# Altium PCB KNoT-Gateway Mini Starter Board.PcbDoc
Units mil, origin at the board's own origin, x right, y up, seen from the top; angles counter-clockwise.
Board outline 1800 x 800 mil, 2 copper layers (Top Layer, Bottom Layer); 14 components, 16 nets, 52 pads, 8 vias.
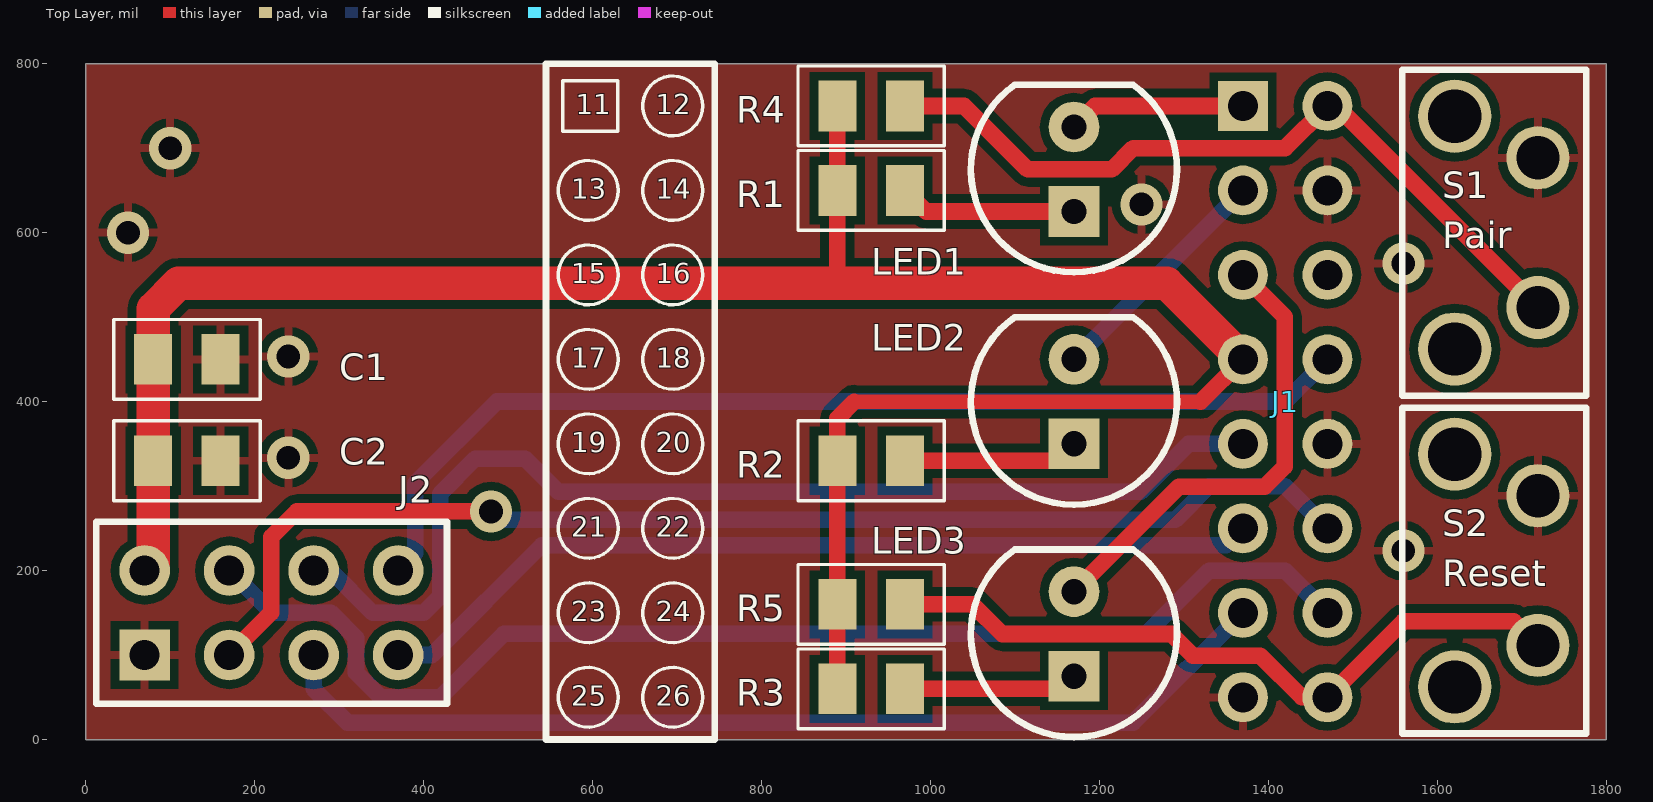
[diagram p0: Top Layer view]
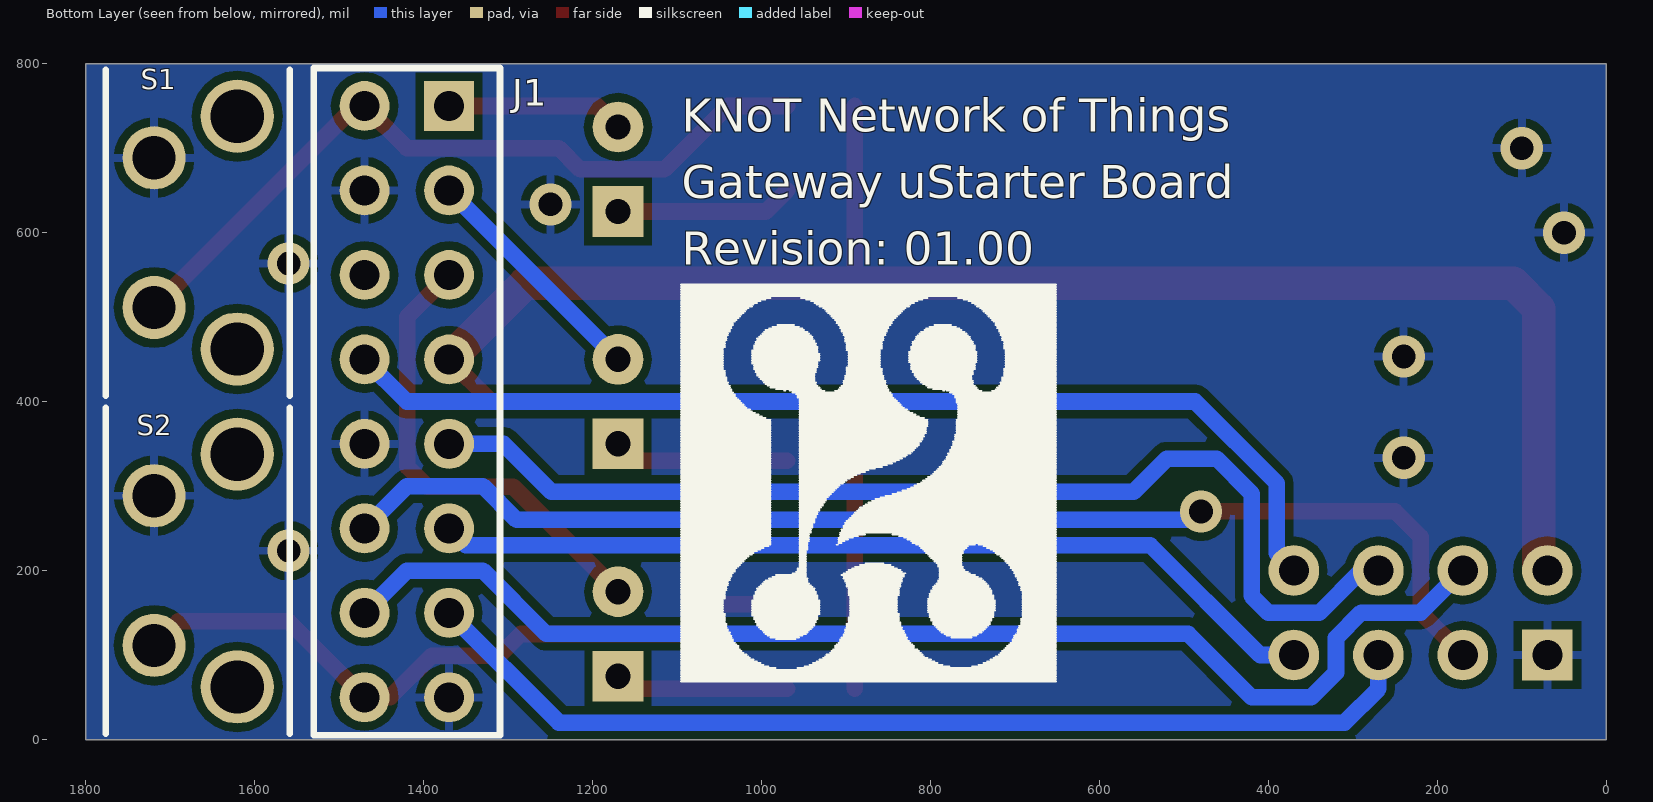
[diagram p1: Bottom Layer view, seen from below]

## Layer stack, top to bottom
Top Solder: solder mask 0.4, Solder Resist, Dk 3.5
Top Layer: signal copper 1.4
Dielectric 1: dielectric 12.6, FR-4, Dk 4.8
Bottom Layer: signal copper 1.4
Bottom Solder: solder mask 0.4, Solder Resist, Dk 3.5

## Board outline
0,0 0,800 1800,800 1800,0

## Design rules (kind name [scope] priority, off if disabled: settings)
Clearance [All] p1: gap=10
Clearance Clearance_1 [All vs (InNamedPolygon('Top Layer-GND'))] p2: gap=15.75
PolygonConnect [All] p1: connectstyle=Relief reliefconductorwidth=10 reliefentries=4 polygonreliefangle="90 Angle" airgapwidth=10
RoutingVias [All] p1: holewidth=28 width=50 viastyle="Through Hole" minholewidth=28 minwidth=50 maxholewidth=28 maxwidth=50
SMDNeckDown [All] p1: percent=90.000
SilkToSilkClearance [All] p1: silktosilkclearance=3.94
SolderMaskExpansion [All] p1: expansion=4
Width Width_Power [InNetClass('Power')] p1: maxlimit=39.37 minlimit=15.75 preferedwidth=19.68 minimp=50.000000 maximp=50.000000 favimp=50.000000
Width [All] p2: maxlimit=19.68 minlimit=10 preferedwidth=10 minimp=50.000000 maximp=50.000000 favimp=50.000000
28 further rules are at their usual default settings.

## Classes and differential pairs
net class Power: 3V3 GND

## Components (designator, comment, footprint, x,y, rotation, side; value= is the part's Value field where it differs from the comment)
C1 "Cap 0805 0.1uF" 0805_CAPS 119.83,450 r0 top
C2 "Cap 0805 10uF" 0805_CAPS 119.83,330 r0 top
J1 "Female 2x8 header" "FEMALE HEADER 2X8" 1419.83,400 r270 top
J2 "2x4 Female Header" nRF24L01+PA+LNA 219.83,150 r180 top
LED1 "LED RADIAL 5MM RED" "LED RADIAL 5MM RED" 1169.83,625 r90 top
LED2 "LED RADIAL 5MM GREEN" "LED RADIAL 5MM GREEN" 1169.83,350 r90 top
LED3 "LED RADIAL 5MM GREEN" "LED RADIAL 5MM GREEN" 1169.83,75 r90 top
R1 "RES_0805" 0805_RES 929.83,650 r180 top
R2 "RES_0805" 0805_RES 929.83,330 r180 top
R3 "RES_0805" 0805_RES 929.83,60 r180 top
R4 "RES_0805" 0805_RES 929.83,750 r180 top
R5 "RES_0805" 0805_RES 929.83,160 r180 top
S1 "Push Button" "Tac Push Button L" 1669.83,600 r270 bottom
S2 "Push Button" "Tac Push Button S" 1669.83,200 r270 bottom

## Footprints (in the part's own frame and the unit in brackets; to place one, negate y for a bottom-side part, rotate by r counter-clockwise, add the part's x,y. Pads: shape width x height; smd on the part's side, far side on the other; paste and mask are expansions set on the pad)
0805_CAPS [mil] "08'' x 05'' Passive Surface Mounted Device"
  rect 45x60 smd: 1(-40,0) 2(40,0)
  silkscreen extent -87,-47 87,47, body extent -39,-25 39,25, height 39
0805_RES [mil] "08'' x 05'' Passive Surface Mounted Device"
  rect 45x60 smd: 1(-40,0) 2(40,0)
  silkscreen extent -87,-47 87,47, body extent -45,-27 45,27, height 30
"FEMALE HEADER 2X8" [mm] "Female Header Bottom Connector 2x8"
  rect 1.5x1.5 hole 0.9: 1(-8.89,-1.27)
  round 1.5 hole 0.9: 2(-8.89,1.27) 3(-6.35,-1.27) 4(-6.35,1.27) 5(-3.81,-1.27) 6(-3.81,1.27) 7(-1.27,-1.27) 8(-1.27,1.27) 9(1.27,-1.27) 10(1.27,1.27) 11(3.81,-1.27) 12(3.81,1.27) 13(6.35,-1.27) 14(6.35,1.27) 15(8.89,-1.27) 16(8.89,1.27)
  body extent -10.16,-2.54 10.16,2.54, height 3.05
"LED RADIAL 5MM GREEN" [mil] "LED RADIAL 5MM THROUGH HOLE 100 MILS PITCH"
  rect 60x60 hole 30: 1(0,0)
  round 60 hole 30: 2(100,0)
  silkscreen extent -72,-122 150,122, body extent -68,-118 148,118, height 352
"LED RADIAL 5MM RED" [mil] "LED RADIAL 5MM THROUGH HOLE 100 MILS PITCH"
  rect 60x60 hole 30: 1(0,0)
  round 60 hole 30: 2(100,0)
  silkscreen extent -72,-122 150,122, body extent -68,-118 148,118, height 352
nRF24L01+PA+LNA [mil] "nRF24L01+PA+LNA MODULE"
  rect 60x60 hole 35.43: 1(150,50)
  round 60 hole 35.43: 2(150,-50) 3(50,50) 4(50,-50) 5(-50,50) 6(-50,-50) 7(-150,50) 8(-150,-50)
  silkscreen extent -208,-108 207,108, body extent -301,-2439 292,125
"Tac Push Button L" [mm] "Panasonic Small Tac Push Button 8.35mm"
  round 2.2 hole 1.6: 0(-3.5,1.25) 0(3.5,1.25)
  round 1.9 hole 1.3: 1(-2.25,-1.25) 2(2.25,-1.25)
  silkscreen extent -4.9,-2.7 4.9,2.83, body extent -4.06,-9.38 4.04,2.27, height 7.31
"Tac Push Button S" [mm] "Panasonic Small Tac Push Button 5.85mm"
  round 2.2 hole 1.6: 0(-3.5,1.25) 0(3.5,1.25)
  round 1.9 hole 1.3: 1(-2.25,-1.25) 2(2.25,-1.25)
  silkscreen extent -4.9,-2.7 4.9,2.83, body extent -3.94,-6.99 4.16,2.16, height 7.31

## Part data
C1: library part Cap_0805_0.1uF, "0.1µF  Ceramic Capacitor 0805"
C2: library part Cap_0805_10uF, "10uF Ceramic Capacitor 0805"
J1: library part "2x8 RPi Header", "Female Bottom 2x4 Header"
J2: library part nRF24L01+, "nRF24L01 2x4 HEADER"
LED1 LED2 LED3: "LED RADIAL"
R1 R2 R3 R4 R5: "Precision Thick Film Chip Resistor, 10 Ohm to 1M Ohm Range, 1% and 0.5% Tolerance, 0805 Size, 1/8 W"
S1: library part "Push Button L", "Tactile Push Button Right Angle"
S2: library part "Push Button S", "Tactile Push Button Right Angle"

## Via types
v1: diameter 50, hole 28, Top Layer to Bottom Layer, 8 vias

## Nets (pads, with @x,y where several pads share a name; then routed paths per layer and width w, separated by ;. In a path a pad name is that pad's centre, name@x,y a point inside that pad or via, vN(x,y) a via of type N, cw(c..) or ccw(c..) an arc to the next point about the centre after c; other vN are vias at no path point)
3V3: C1.1 C2.1 J1.7 J2.2 R1.2 R2.2 R3.2 R4.2 R5.2 | length 2692.8
  Top Layer w17.72: 909.65,399.82 1319.65,399.82
  Top Layer w19.68: R3.2 R5.2 889.83,380 909.65,399.82 ; 889.83,540 R1.2 R4.2 ; 1319.65,399.82 J1.7
  Top Layer w39.37: J2.2 79.83,210 C2.1 C1.1 79.83,510 109.83,540 889.83,540 1279.83,540 J1.7
GND: C1.2 C2.2 J1.4 J1.10 J1.15 J2.1 S1.1 S2.1
  other v1: 1559.83,223.48 239.83,333.48 239.83,453.48 1559.83,563.48 50,600 1249.83,633.48 100,700
LED1: J1.1 LED1.2 | length 210.4
  Top Layer w19.68: LED1.2 1194.83,750 J1.1
LED2: J1.3 LED2.2 | length 282.8
  Bottom Layer w19.68: LED2.2 J1.3
LED3: J1.5 LED3.2 | length 558.2
  Top Layer w19.68: LED3.2 1294.2,299.37 1395.71,299.37 1419.2,322.85 1419.2,500.63 J1.5
NetLED1_1: LED1.1 R1.1 | length 210.4
  Top Layer w19.68: R1.1 994.83,625 LED1.1
NetLED2_1: LED2.1 R2.1 | length 208.3
  Top Layer w19.68: R2.1 1149.83,330 LED2.1
NetLED3_1: LED3.1 R3.1 | length 206.2
  Top Layer w19.68: R3.1 1154.83,60 LED3.1
NRF_CE: J1.12 J2.3 | length 1464.6
  Top Layer w19.68: J2.3 169.83,100.32 219.67,150.16 219.67,239.84 249.83,270 v1(479.83,270)
  Bottom Layer w19.68: v1(479.83,270) 489.83,260 1289.83,260 1329.83,300 1419.83,300 J1.12
NRF_CLK: J1.13 J2.5 | length 1210.4
  Bottom Layer w19.68: J2.5 269.83,60 309.83,20 1239.83,20 J1.13
NRF_CSN: J1.14 J2.4 | length 1469
  Bottom Layer w19.68: J2.4 170.14,200 219.98,150.16 290.16,150.16 319.98,120.33 319.98,79.36 349.18,50.16 369.67,50.16 369.83,50 419.83,50 494.98,125.16 1254.98,125.16 1329.83,200 1419.83,200 J1.14
NRF_IRQ: J1.8 J2.8 | length 1252.2
  Bottom Layer w19.68: J2.8 390.14,220.32 390.14,303.44 486.86,400.16 1419.98,400.16 J1.8
NRF_MISO: J1.11 J2.7 | length 1062.1
  Bottom Layer w19.68: J2.7 409.83,100 539.83,230 1349.83,230 J1.11
NRF_MOSI: J1.9 J2.6 | length 1307.1
  Bottom Layer w19.68: J2.6 289.83,200 339.83,150 399.83,150 419.83,170 419.83,291.14 461.16,332.48 520.22,332.48 559.59,293.11 1248.57,293.11 1305.46,350 J1.9
SW_PAIR: J1.2 R4.1 S1.2 | length 910.3
  Top Layer w19.68: R4.1 1039.83,750 1114.98,674.84 1214.67,674.84 1239.83,700 1419.83,700 J1.2 1480.46,750 S1.2
SW_RESET: J1.16 R5.1 S2.2 | length 843.9
  Top Layer w19.68: R5.1 1049.83,160 1084.98,124.84 1284.98,124.84 1310.46,99.37 1390.28,99.37 1439.65,50 J1.16 1559.83,140 1690.46,140 S2.2
pads on no net: J1.6 S1.0 S2.0

## Polygon pours and split planes (outlines as drawn)
GND on Top Layer "Top Layer-GND" (solid, pour order 4): 0,800 0,0 1800,0 1800,800
GND on Bottom Layer "Bot Layer-GND" (solid, pour order 3): 0,800 0,0 1800,0 1800,800

## Silkscreen, mask and mechanical layers (free items; w line width, h text height)
Top Overlay:
  circle w3.94: c694.83,750 r35.43
  circle w3.94: c694.83,650 r35.43
  circle w3.94: c594.83,650 r35.43
  circle w3.94: c594.83,550 r35.43
  circle w3.94: c594.83,450 r35.43
  circle w3.94: c594.83,350 r35.43
  circle w3.94: c594.83,250 r35.43
  circle w3.94: c594.83,50 r35.43
  circle w3.94: c594.83,150 r35.43
  circle w3.94: c694.83,50 r35.43
  circle w3.94: c694.83,150 r35.43
  circle w3.94: c694.83,250 r35.43
  circle w3.94: c694.83,350 r35.43
  circle w3.94: c694.83,450 r35.43
  circle w3.94: c694.83,550 r35.43
  lines w3.94: 564.83,720 564.83,725 564.83,775 564.83,780 629.83,780 629.83,775 629.83,725 629.83,720 569.83,720 564.83,720
  lines w7.87: 544.83,0 744.83,0 744.83,800 544.83,800 544.83,0 ; 1558.53,7.09 1558.53,392.91 1776.13,392.91 1776.13,7.09 1558.53,7.09 ; 1558.53,407.09 1558.53,792.91 1776.13,792.91 1776.13,407.09 1558.53,407.09
  text "11" at 580,740 h23.62
  text "12" at 675,740 h23.62
  text "S1" at 1606.05,640.55 h31.5
  text "13" at 575,640 h23.62
  text "14" at 675,640 h23.62
  text "Pair" at 1606.05,581.5 h31.5
  text "15" at 575,540 h23.62
  text "16" at 675,540 h23.62
  text "17" at 575,440 h23.62
  text "18" at 675,440 h23.62
  text "19" at 575,340 h23.62
  text "20" at 675,340 h23.62
  text "S2" at 1606.05,240.55 h31.5
  text "21" at 575,240 h23.62
  text "22" at 675,240 h23.62
  text "Reset" at 1606.05,181.5 h31.5
  text "23" at 575,140 h23.62
  text "24" at 675,140 h23.62
  text "25" at 575,40 h23.62
  text "26" at 675,40 h23.62
Bottom Overlay:
  drawing of 866 lines, arcs and shapes, not listed
  text "KNoT Network of Things" at 1094.24,719.29 h39.37
  text "Gateway uStarter Board" at 1094.24,640.55 h39.37
  text "Revision: 01.00" at 1094.24,561.81 h39.37
Mechanical 1:
  the board outline again, w3.94

## Dimensions
0,800 to 0,0 on Mechanical 1
0,800 to 1800,800 on Mechanical 1